# Altium PCB US-8_L2.4-W2.1-P0.50-LS3.2-BR_2021-01-09.pcbdoc
Units mm, origin at the board's own origin, x right, y up, seen from the top; angles counter-clockwise.
Board outline 32.68 x 28.33 mm, 2 copper layers (Top Layer, Bottom Layer); 1 components, 0 nets, 8 pads, 0 vias.
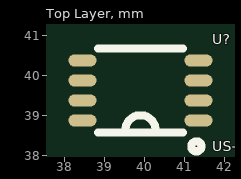
[diagram p0: Top Layer view]
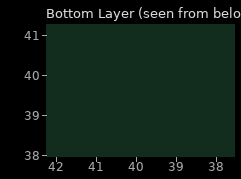
[diagram p1: Bottom Layer view, seen from below]

## Layer stack, top to bottom
Top Layer: signal copper (thickness not stored)
Dielectric: dielectric 0.32, FR-4, Dk 4.8
Bottom Layer: signal copper (thickness not stored)

## Board outline
58.083,25.4 25.4,25.4 25.4,53.728 58.083,53.728

## Components (designator, comment, footprint, x,y, rotation, side; value= is the part's Value field where it differs from the comment)
U? "US-8_L2.4-W2.1-P0.50-LS3.2-BR" US-8_L2.4-W2.1-P0.50-LS3.2-BR 39.9,39.437 r0 top

## Footprints (in the part's own frame and the unit in brackets; to place one, negate y for a bottom-side part, rotate by r counter-clockwise, add the part's x,y. Pads: shape width x height; smd on the part's side, far side on the other; paste and mask are expansions set on the pad)
US-8_L2.4-W2.1-P0.50-LS3.2-BR [mm]
  oval 0.7x0.3 smd: 1(1.45,-0.563) 2(1.45,-0.063) 3(1.45,0.437) 4(1.45,0.937) 5(-1.45,0.937) 6(-1.45,0.437) 7(-1.45,-0.063) 8(-1.45,-0.563)
  silkscreen extent -1.06,-1.34 1.52,1.24

## Nets (pads, with @x,y where several pads share a name; then routed paths per layer and width w, separated by ;. In a path a pad name is that pad's centre, name@x,y a point inside that pad or via, vN(x,y) a via of type N, cw(c..) or ccw(c..) an arc to the next point about the centre after c; other vN are vias at no path point)
pads on no net: U?.1 U?.2 U?.3 U?.4 U?.5 U?.6 U?.7 U?.8

## Silkscreen, mask and mechanical layers (free items; w line width, h text height)
Document:
  lines w0.003: 41.716,39.539 41.767,39.589